# Altium PCB Power_V1.PcbDoc
Units mil, origin at the board's own origin, x right, y up, seen from the top; angles counter-clockwise.
Board outline 3352.9 x 1907.9 mil, 2 copper layers (Top Layer, Bottom Layer); 20 components, 11 nets, 54 pads, 0 vias.
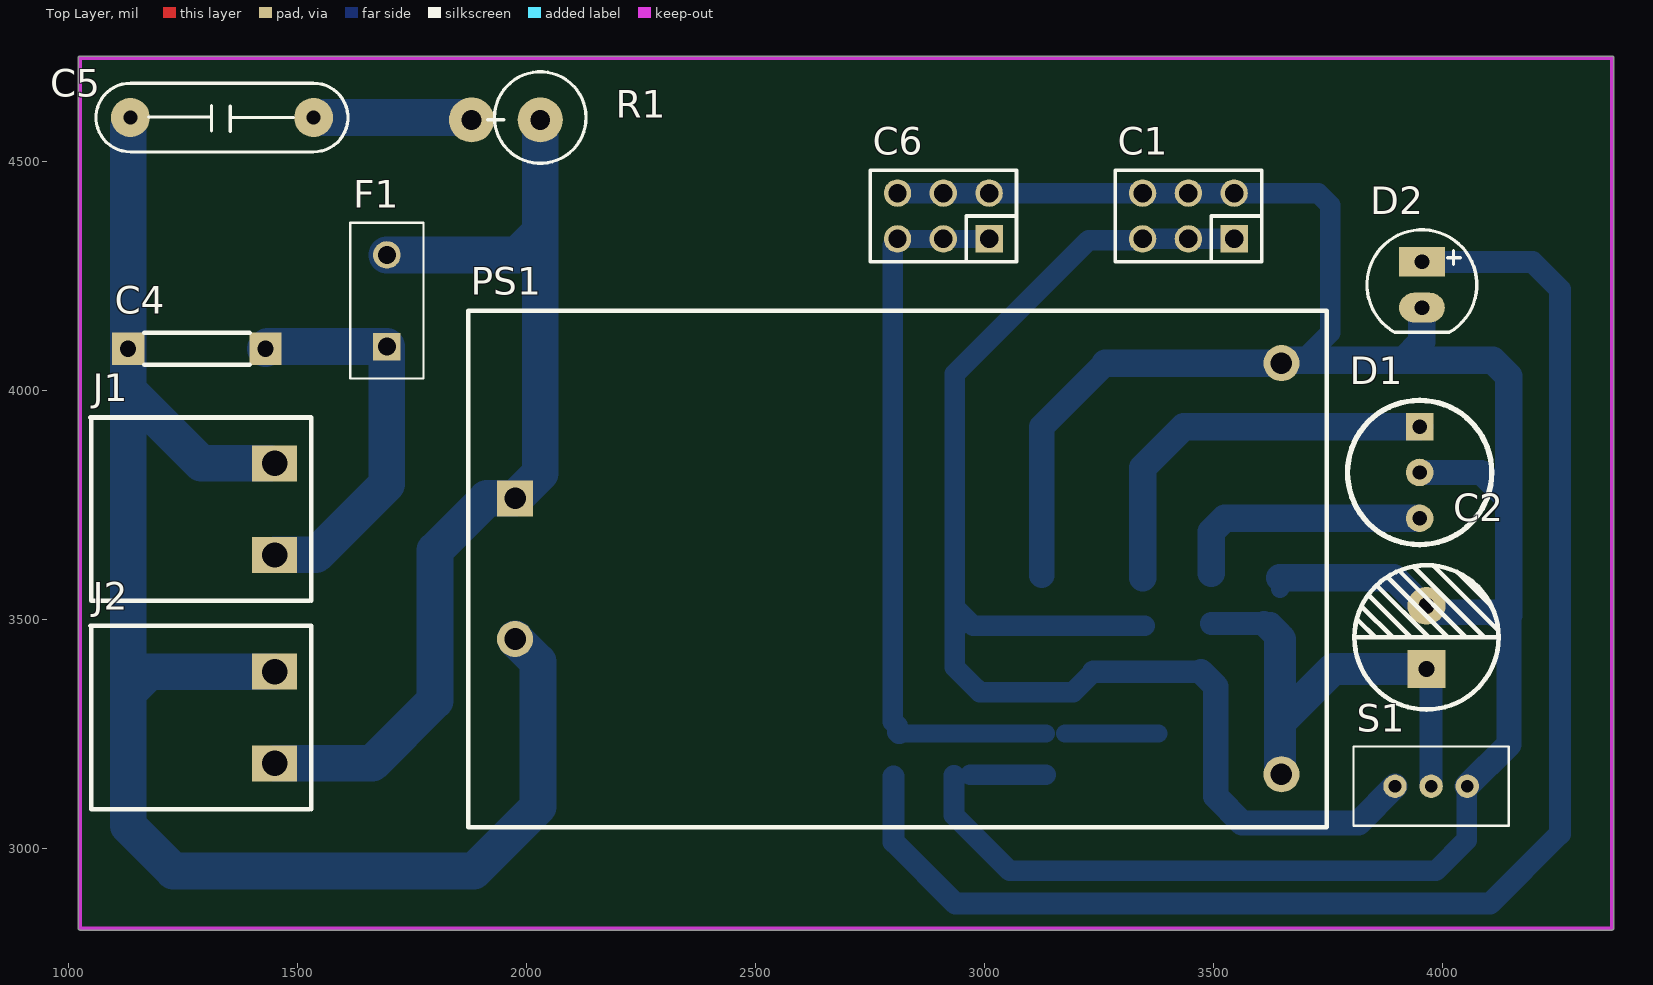
[diagram p0: Top Layer view]
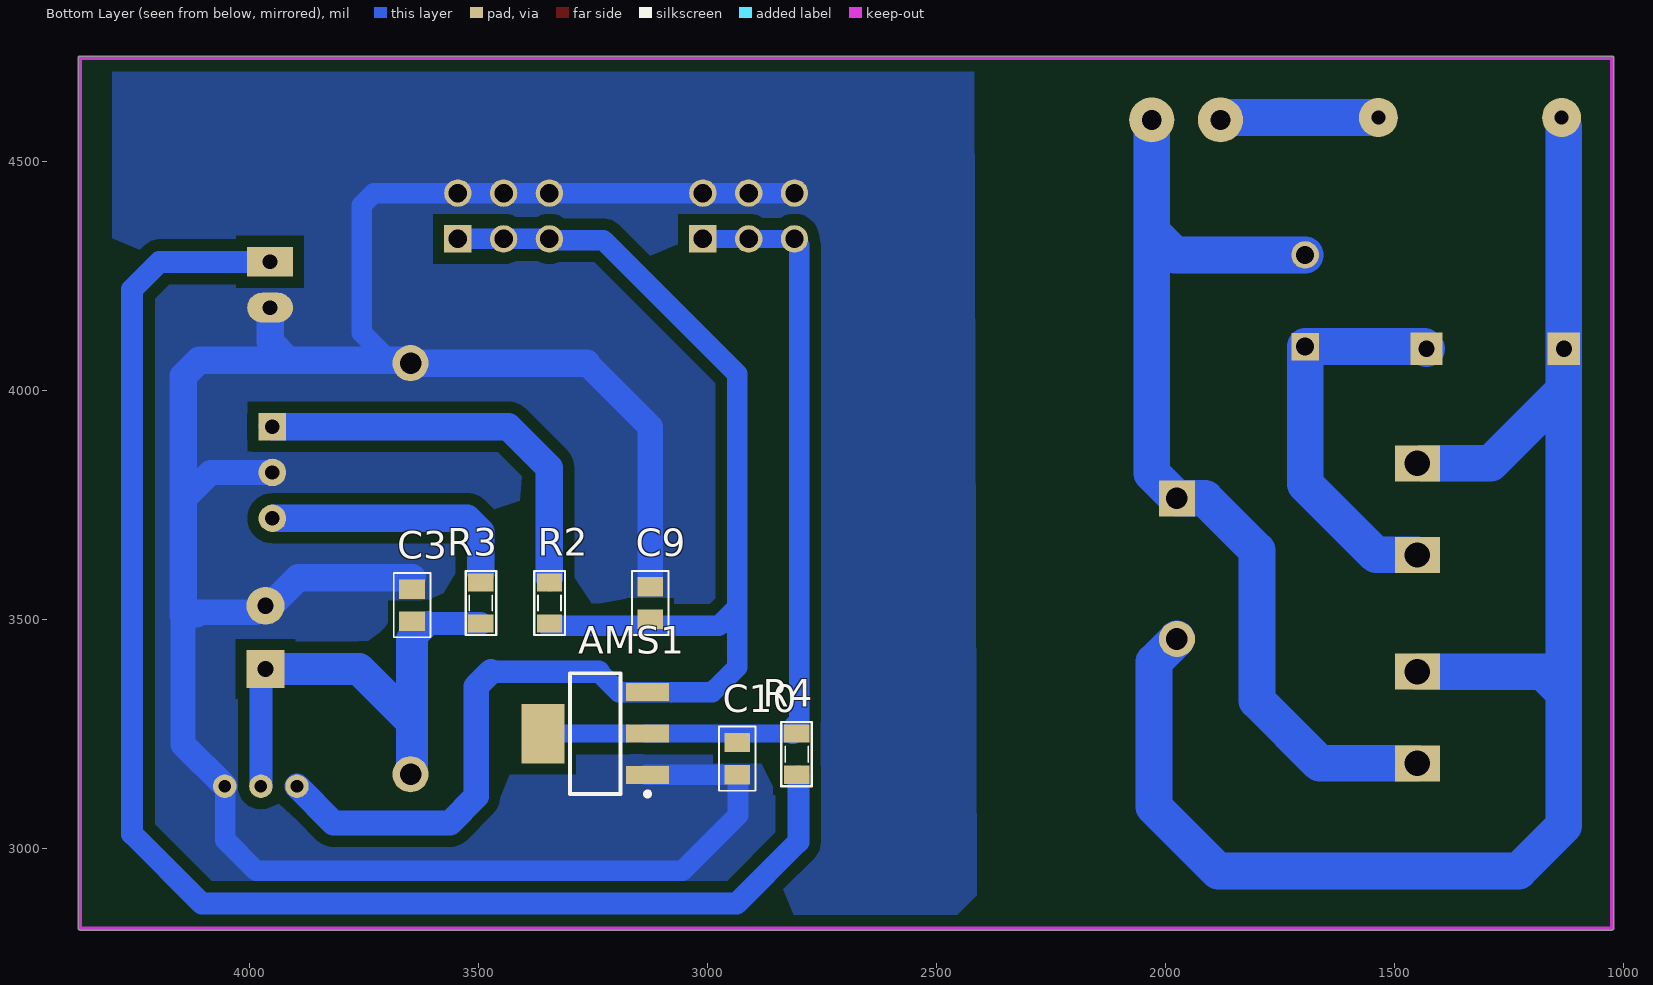
[diagram p1: Bottom Layer view, seen from below]

## Layer stack, top to bottom
Top Solder: solder mask 0.4, Solder Resist, Dk 3.5
Top Layer: signal copper 1.4
Dielectric 1: dielectric 12.6, FR-4, Dk 4.8
Bottom Layer: signal copper 1.4
Bottom Solder: solder mask 0.4, Solder Resist, Dk 3.5

## Board outline
1025,2821.05 cw(c1025,2825) 1021.05,2825 1021.05,4725 cw(c1025,4725) 1025,4728.95 4370,4728.95 cw(c4370,4725) 4373.95,4725 4373.95,2825 cw(c4370,2825) 4370,2821.05

## Design rules (kind name [scope] priority, off if disabled: settings)
Clearance [All] p1: gap=25 ignorepadtopadclearanceinfootprint=FALSE
PlaneConnect [All] p1: planeconnectstyle=Direct reliefexpansion=20 reliefentries=4 reliefconductorwidth=10 reliefairgap=10
PolygonConnect [All] p1: connectstyle=Direct reliefconductorwidth=10 reliefentries=4 polygonreliefangle="90 Angle" airgapwidth=10
RoutingVias [All] p1: holewidth=28 width=50 viastyle="Through Hole" minholewidth=28 minwidth=50 maxholewidth=28 maxwidth=50
SolderMaskExpansion [All] p1: expansion=4 istentingtop=FALSE
SupplyNets "Schematic Supply Nets_4" [InNet('5 OUT')] p1: voltage=0.000
SupplyNets "Schematic Supply Nets_3" [InNet('5 IN')] p2: voltage=0.000
SupplyNets "Schematic Supply Nets_2" [InNet('GND')] p3: voltage=0.000
SupplyNets "Schematic Supply Nets" [InNet('3V3')] p4: voltage=0.000
Width [All] p1: maxlimit=80 minlimit=40 preferedwidth=60
29 further rules are at their usual default settings.

## Components (designator, comment, footprint, x,y, rotation, side; value= is the part's Value field where it differs from the comment)
AMS1 "AMS1117-3.3V" SOT223 3245,3250 r90 bottom value="AMS1117-3.3V SOT223"
C1 "JP3x2" JP3-C2T 3445.01,4380 r180 top
C2 "220uF" "Tu hoa 8mm" 3965,3460 r90 top
C3 "104" "cap 0805" 3645,3530.24 r90 bottom
C4 "2KV" "Cap 7.5mm" 1130,4090 r0 top
C5 "104-400V" "Cap 10mm" 1535,4595 r180 top
C6 "JP3x2" JP3-C2T 2910,4380 r180 top
C9 "10uf" "cap 0805" 3125,3535 r90 bottom
C10 "10uf" "cap 0805" 2935,3195.24 r270 bottom
D1 "LED 2 Color CC" "LED RB-RG 3MM" 3950,3820 r270 top
D2 "LED" LED-5MM-RED 3955,4280 r270 top
F1 "4A" "Fuse rectangular" 1695,4095 r90 top value=Fuse
J1 "AC IN" "CON 2 2EDG5.08 B" 1450,3640 r90 top
J2 "AC OUT" "CON 2 2EDG5.08 B" 1450,3185 r90 top
PS1 "HLK-PM01 5V" CONV_HLK-10W 1975,3610 r0 top
R1 "47/2W" R2WD 1830,4590 r0 top value="R2W - 47"
R2 "1K" RES-SMD-0805 3345,3535 r90 bottom
R3 "1K" RES-SMD-0805 3495,3535 r90 bottom
R4 "1K" RES-SMD-0805 2805,3205 r270 bottom
S1 "SW_THD_SPDT" "SWITCH SPDT 1P2T 2mm" 4022.24,3158.62 r0 top

## Footprints (in the part's own frame and the unit in brackets; to place one, negate y for a bottom-side part, rotate by r counter-clockwise, add the part's x,y. Pads: shape width x height; smd on the part's side, far side on the other; paste and mask are expansions set on the pad)
"Cap 7.5mm" [mm] "103 2KV"
  rect 1.8x1.8 hole 0.9: 1(0,0) 2(7.62,0)
  silkscreen extent 0.89,-0.89 6.73,0.89, body extent -0.19,-1.2 7.81,1.19, height 9.03
"Cap 10mm" [mil] "Cap np W 0.4"
  round 85 hole 31: 1(0,0) 2(400,0)
  silkscreen extent -75,-75 475,75, body extent -25,-64 431,64, height 236
"cap 0805" [mm]
  rect 1.08x1.42 smd: 1(-0.895,0) 2(0.895,0)
  silkscreen extent -1.78,-1.02 1.78,1.02, body extent -1,-0.63 1,0.63, height 1.4
"CON 2 2EDG5.08 B" [mm]
  rect 2x2.5 hole 1.4: 1(0,0) 2(5.08,0)
  silkscreen extent -2.54,-2.03 7.62,10.21, body extent -2.5,-1.75 7.58,10.25, height 3.15
CONV_HLK-10W [mm]
  rect 2x2 hole 1.2: 1(0,3.9)
  round 2 hole 1.2: 2(0,-3.9) 3(42.5,11.4) 4(42.5,-11.4)
  silkscreen extent -2.6,-14.34 45.03,14.3, body extent -2.54,-14.25 44.96,14.25, height 22.5
"Fuse rectangular" [mil] "5.08 0.6"
  rect 60x60 hole 39.37: 1(0,0)
  round 60 hole 39.37: 2(200,0)
  silkscreen extent -70,-80 270,80, body extent -67,-79 267,79, height 315
JP3-C2T [mm] "6 pins, dual row, straight, gold plating"
  rect 1.52x1.52 hole 1.02: 1(-2.54,1.27)
  round 1.52 hole 1.02: 2(0,1.27) 3(2.54,1.27) 4(2.54,-1.27) 5(0,-1.27) 6(-2.54,-1.27)
  silkscreen extent -4.06,-2.54 4.06,2.54, body extent -4.06,-2.54 4.06,2.54, height 8.51
"LED RB-RG 3MM" [mil]
  rect 60x60 hole 31.5: 1(-100,0)
  round 60 hole 31.5: 2(0,0) 3(100,0)
  silkscreen extent -157,-157 157,157, body extent -109,-74 109,74, height 406
LED-5MM-RED [mil] "LED 2 PIN, 5mm, Only colour,pin to pin 100mil"
  rect 65x100 hole 32: 1(0,0)
  oval 65x100 hole 32: 2(100,0)
  silkscreen extent -70,-120 154,120, body extent -65,-119 149,118, height 339
R2WD [mm] "R2W, 2 pin, 150mil"
  round 2.5 hole 1.1: 1(1.27,0) 2(5.08,0)
  silkscreen extent 2.16,-2.41 7.62,2.66, body extent -1.25,-2.41 7.6,2.59, height 13.97
RES-SMD-0805 [mil]
  rect 39.37x55 smd: 1(-45,0) 2(45,0)
  silkscreen extent -70,-34 70,33, body extent -39,-25 39,25, height 31
SOT223 [mm]
  rect 1x2.4 smd: 1(-2.3,-2.9) 2(0,-2.9) 3(2.3,-2.9)
  rect 3.3x2.4 smd: 4(0,2.9)
  silkscreen extent -3.47,-3.02 3.35,1.4, body extent -3.25,-3.56 3.25,3.4, height 1.68
"SWITCH SPDT 1P2T 2mm" [mm] "TE Connectivity SLS121PC04 SPDT slider"
  round 1.3 hole 0.7: 1(-3.2,-0.6) 2(-1.2,-0.6) 3(0.8,-0.6)
  silkscreen extent -5.5,-2.8 3.1,1.6, body extent -5.56,-2.54 3.02,1.17, height 7.05
"Tu hoa 8mm" [mm]
  rect 2.1x2.1 hole 0.9: 1(-1.75,0)
  round 2.1 hole 0.9: 2(1.75,0)
  silkscreen extent -4,-4 4,4, body extent -4.1,-4.07 4.1,4.13, height 13.81

## Part data
AMS1: library part "AMS1117 SMD", "Dán", Chung_Loai=Dán, Don_Vi=Con, Ma_Hang=MH000596
C1 C6: "WR-PHD 2.54 mm Dual Socket Header", Manufacturer="W¨¹rth Elektronik eiSos GmbH", partNo=61300621821, ComponentLink1 Description=Manufacturer, ComponentLink1URL=http://www.we-online.com, ComponentLink2 Description=Datasheet, ComponentLink2URL=http://katalog.we-online.de/em/datasheet/6130xx21821.pdf, Created by="Karrer Zheng", Created Date="29 March 2013", NoPins=06
C2: library part "Tu Hoa 220uF 25V 8x10", "Cắm", Chung_Loai=Cắm, Don_Vi=Con, Ma_Hang=MH006864, So_Chan=2, Ten_Linh_Kien="Tụ Hóa 220uF 25V 8x10MM"
C3 C5 C9 C10: library part CN, "Capacitor"
C4: library part "Cap 103 2KV", "Capacitor Ceramic 2KV"
D1: "LED 2 color Common Cathode"
F1: library part Fuse, "Fuse", Designed by=VanDungEvn
J1 J2: library part "CON 2 EDG", "CON2 KF terminal"
PS1: library part "CONV HLK-PM01", "220VAC to 5V"
R1: library part R2W, "Resistor 2W"
R2 R3 R4: library part Res-SMD, "Resistor", Manufacturer="Generic Components", Class=Passive, Published=08/06/2000, Publisher="Altium Hobart Technology Centre"
S1: "Switch THD vertical toggle SPDT", Contact Rating @ Voltage="0.25A @ 125VAC", Manufacturer 1="TE Connectivity", Manufacturer Part Number 1=SLS121PC04, Supplier Part Number 1=450-1598-ND, Circuit=SPDT, Mounting Type="PCB mount", SCDType=spec, Supplier 1=Digi-Key

## Nets (pads, with @x,y where several pads share a name; then routed paths per layer and width w, separated by ;. In a path a pad name is that pad's centre, name@x,y a point inside that pad or via, vN(x,y) a via of type N, cw(c..) or ccw(c..) an arc to the next point about the centre after c; other vN are vias at no path point)
3V3: AMS1.2 AMS1.4 C6.1 C6.2 C6.3 C10.1 R4.1 | length 1805.9
  Bottom Layer w40: C6.3 C6.2 C6.1@3001.77,4330 ; R4.1@2815,3250 AMS1.2@3133.31,3250 ; AMS1.2@3175.83,3250 AMS1.4 AMS1.4@3380,3250
  Bottom Layer w45: C6.3 2810,4325.98 2800,4315.98 2800,3276.36 2810,3266.36 2810,3252.82 2812.81,3250 R4.1@2815,3250
"5 IN": C2.1 C3.1 PS1.4 R3.1 S1.2 | length 1111.7
  Bottom Layer w50: R3.1 3610,3490 ; C3.1@3625,3490 3645,3470 ; 3645,3281.46 3648.23,3278.23 ; S1.2 C2.1@3975,3381.1
  Bottom Layer w55: 3610,3490 3645,3455
  Bottom Layer w60: C2.1 C2.1@3975,3381.1
  Bottom Layer w70: PS1.4@3645,3164.41 3645,3281.46 3645,3455 ; 3648.23,3278.23 3761.1,3391.1 C2.1
"5 OUT": AMS1.3 C1.1 C1.2 C1.3 C9.1 R2.1 S1.1 | length 3116.7
  Bottom Layer w45: 3238.09,3385 3193.64,3340.55 AMS1.3 2989.45,3340.55 2970.02,3359.98 2935,3395 2935,3525 ; R2.1@3350,3485 3125,3485 2975,3485 2935,3525 ; C1.1 C1.2 C1.3 3342.17,4327.16 3227.16,4327.16 2935,4035 2935,3525
  Bottom Layer w50: 3238.09,3385 3472.78,3385
  Bottom Layer w55: 3472.78,3385 3505,3352.78 3505,3112.22 3562.22,3055 3816.24,3055 S1.1
AC_L: F1.2 J2.1 PS1.1 R1.2 | length 2157
  Bottom Layer w80: J2.1 1663.14,3185 1800,3321.86 1800,3650 1913.54,3763.54 PS1.1 2030,3818.54 R1.2 ; F1.2 1979.61,4295 2026.47,4341.86
AC_N: C4.1 C5.2 J1.2 J2.2 PS1.2 | length 3623.7
  Bottom Layer w80: C5.2@1130,4575 1130,4000 ; J1.2@1440.79,3840 1290,3840 1130,4000 ; J2.2 1176.86,3385 1130,3338.14 ; PS1.2 2025,3406.46 2025,3090 1885,2950 1228.95,2950 1130,3048.95 1130,3338.14 ; 1130,3338.14 1130,4000
GND: AMS1.1 C1.4 C1.5 C1.6 C2.2 C3.2 C6.4 C6.5 C6.6 C9.2 C10.2 D1.2 D2.2 PS1.3 S1.3 | length 6174.7
  Bottom Layer w40: C3.2 C3.2@3646.26,3566.73
  Bottom Layer w45: C6.4 C6.5 C6.6 C1.4 C1.5 C1.6 3728.64,4430 3755,4403.64 3755,4125 3695.27,4065.27 3654.68,4065.27 PS1.3 ; C10.2@2933.31,3158.76 2933.31,3071.69 3055,2950 3985,2950 4052.56,3017.56 4052.56,3133.82 S1.3 ; 2969.08,3159.84 AMS1.1@3133.31,3159.84 ; C2.2@3954.8,3528.9 C2.2
  Bottom Layer w55: 3125,3595 3125,3920 3263.82,4058.82 ; D1.2 4085,3820 4145,3760 ; C2.2 3972.49,3528.9 3986.39,3515 4108.75,3515 4115,3508.75 4145,3508.75 4145,3226.26 S1.3
  Bottom Layer w60: 3263.82,4058.82 PS1.3 3651.81,4062.4 3665.07,4062.4 3667.66,4065 3915,4065 ; 3645,3590 3893.7,3590 C2.2@3954.8,3528.9 ; D2.2 3955,4105 3915,4065 ; 4145,3508.75 4145,3760 4145,4029.85 4109.85,4065 3915,4065
NetC4_2: C4.2 F1.1 J1.1 | length 876.3
  Bottom Layer w80: C4.2 1435,4095 F1.1 1695,3795 1540,3640 J1.1
NetC5_1: C5.1 R1.1 | length 350
  Bottom Layer w80: C5.1 R1.1@1885,4595
NetD1_1: D1.1 R2.2 | length 882.3
  Bottom Layer w60: R2.2@3345,3590 3345,3830 3435,3920 D1.1
NetD1_3: D1.3 R3.2 | length 555.1
  Bottom Layer w60: 3495,3600 3495,3690.71 3524.29,3720 D1.3@3947.29,3720
NetD2_1: D2.1 R4.2 | length 3230.6
  Bottom Layer w48: R4.2@2801.5,3155.69 2801.5,3013.5 2936.5,2878.5 4103.5,2878.5 4255.98,3030.98 4255.98,4220 4195.98,4280 D2.1

## Polygon pours and split planes (outlines as drawn)
GND on Bottom Layer "GND_L02_P002" (solid, remove dead copper, pour order 2): 2417.62,4725 4300,4725 4300,2825 2412.35,2825

## Keep-outs
Keep-Out Layer:
  lines w7.87: 1025,2825 4370,2825 4370,4725 1025,4725 1025,2825